# Altium PCB fmc-5pof.PcbDoc (part 1 of 2)
Units mm, origin at the board's own origin, x right, y up, seen from the top; angles counter-clockwise.
Board outline 76.75 x 69 mm, 2 copper layers (Top Layer, Bottom Layer); 109 components, 129 nets, 446 pads, 85 vias.
Unrouted connection lines stored in the file: 1.
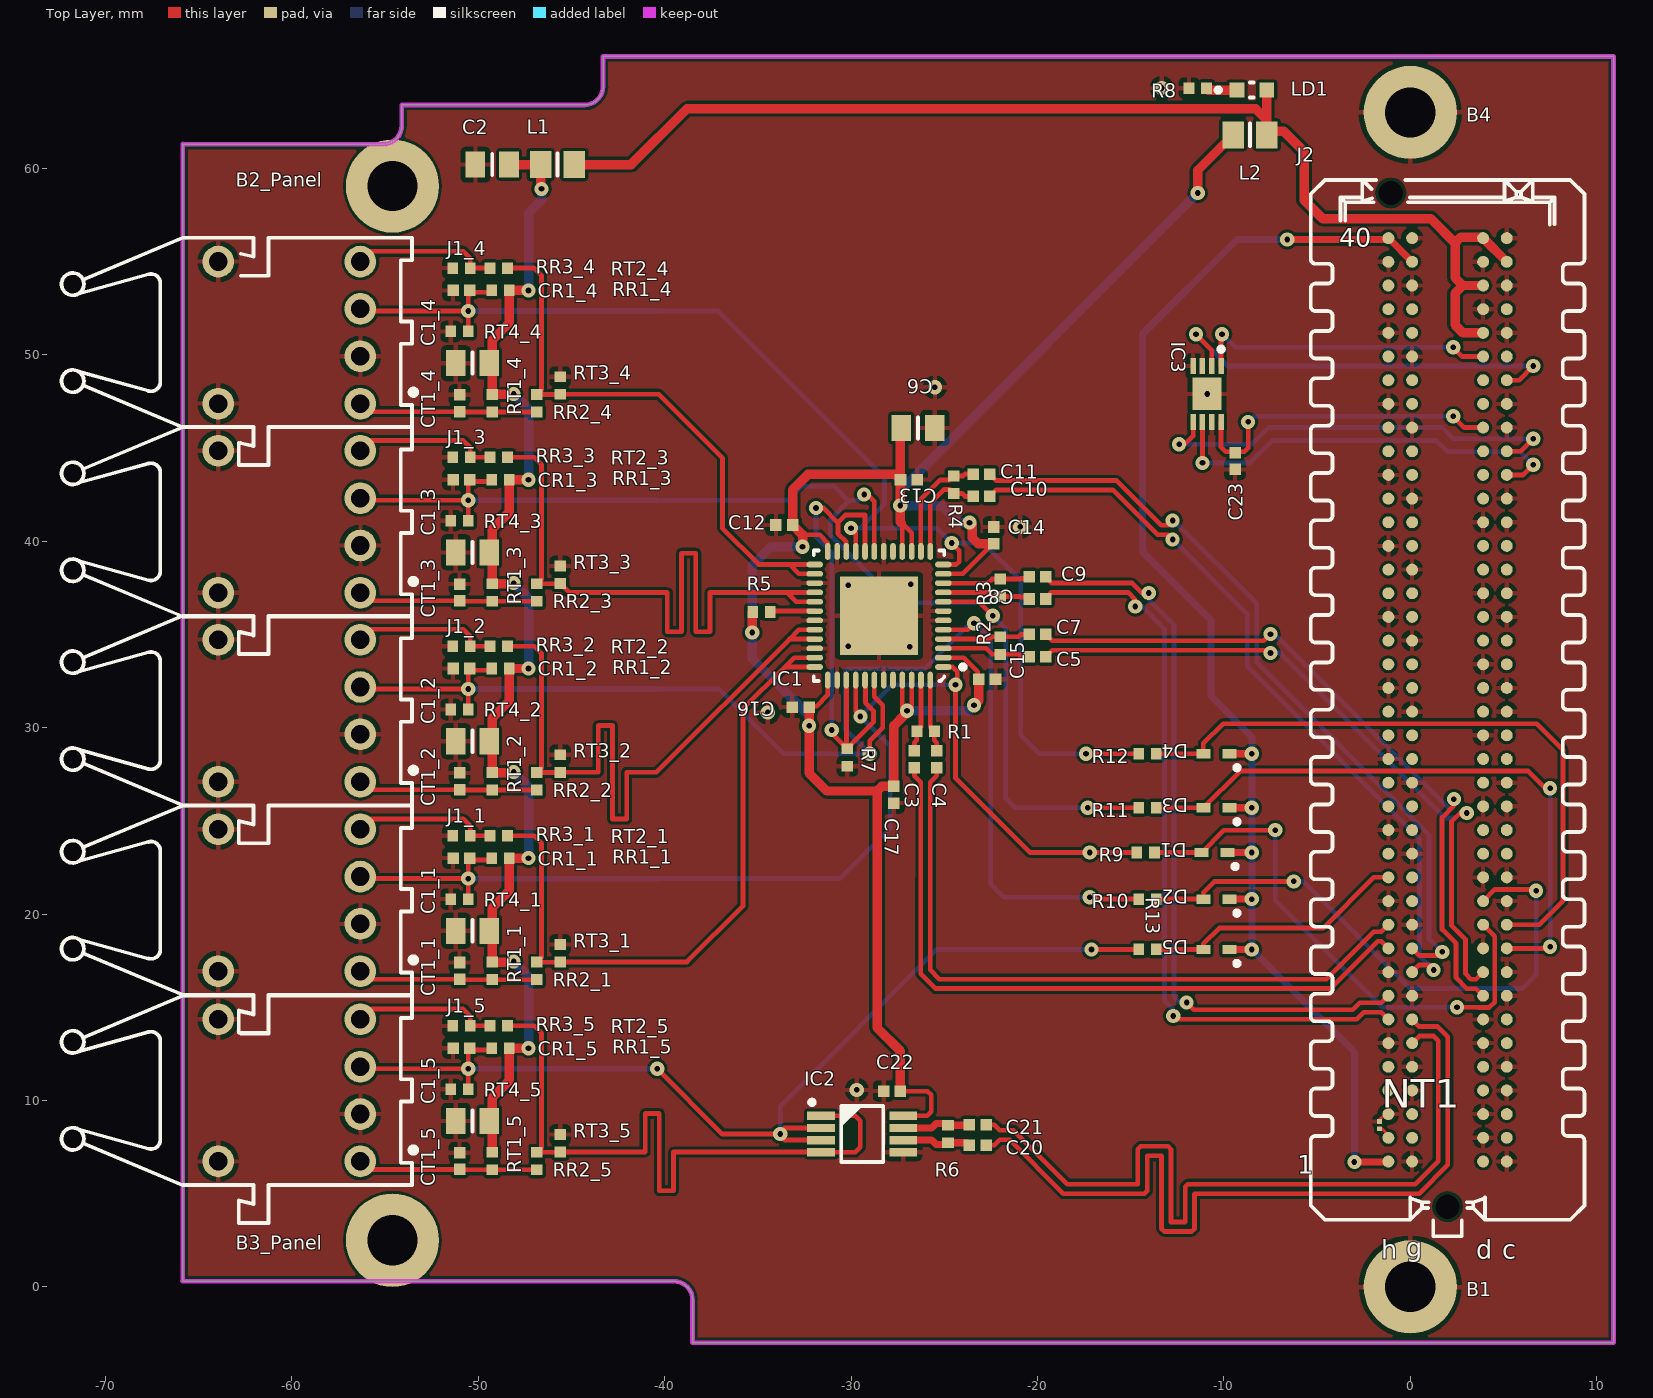
[diagram p0: Top Layer view]
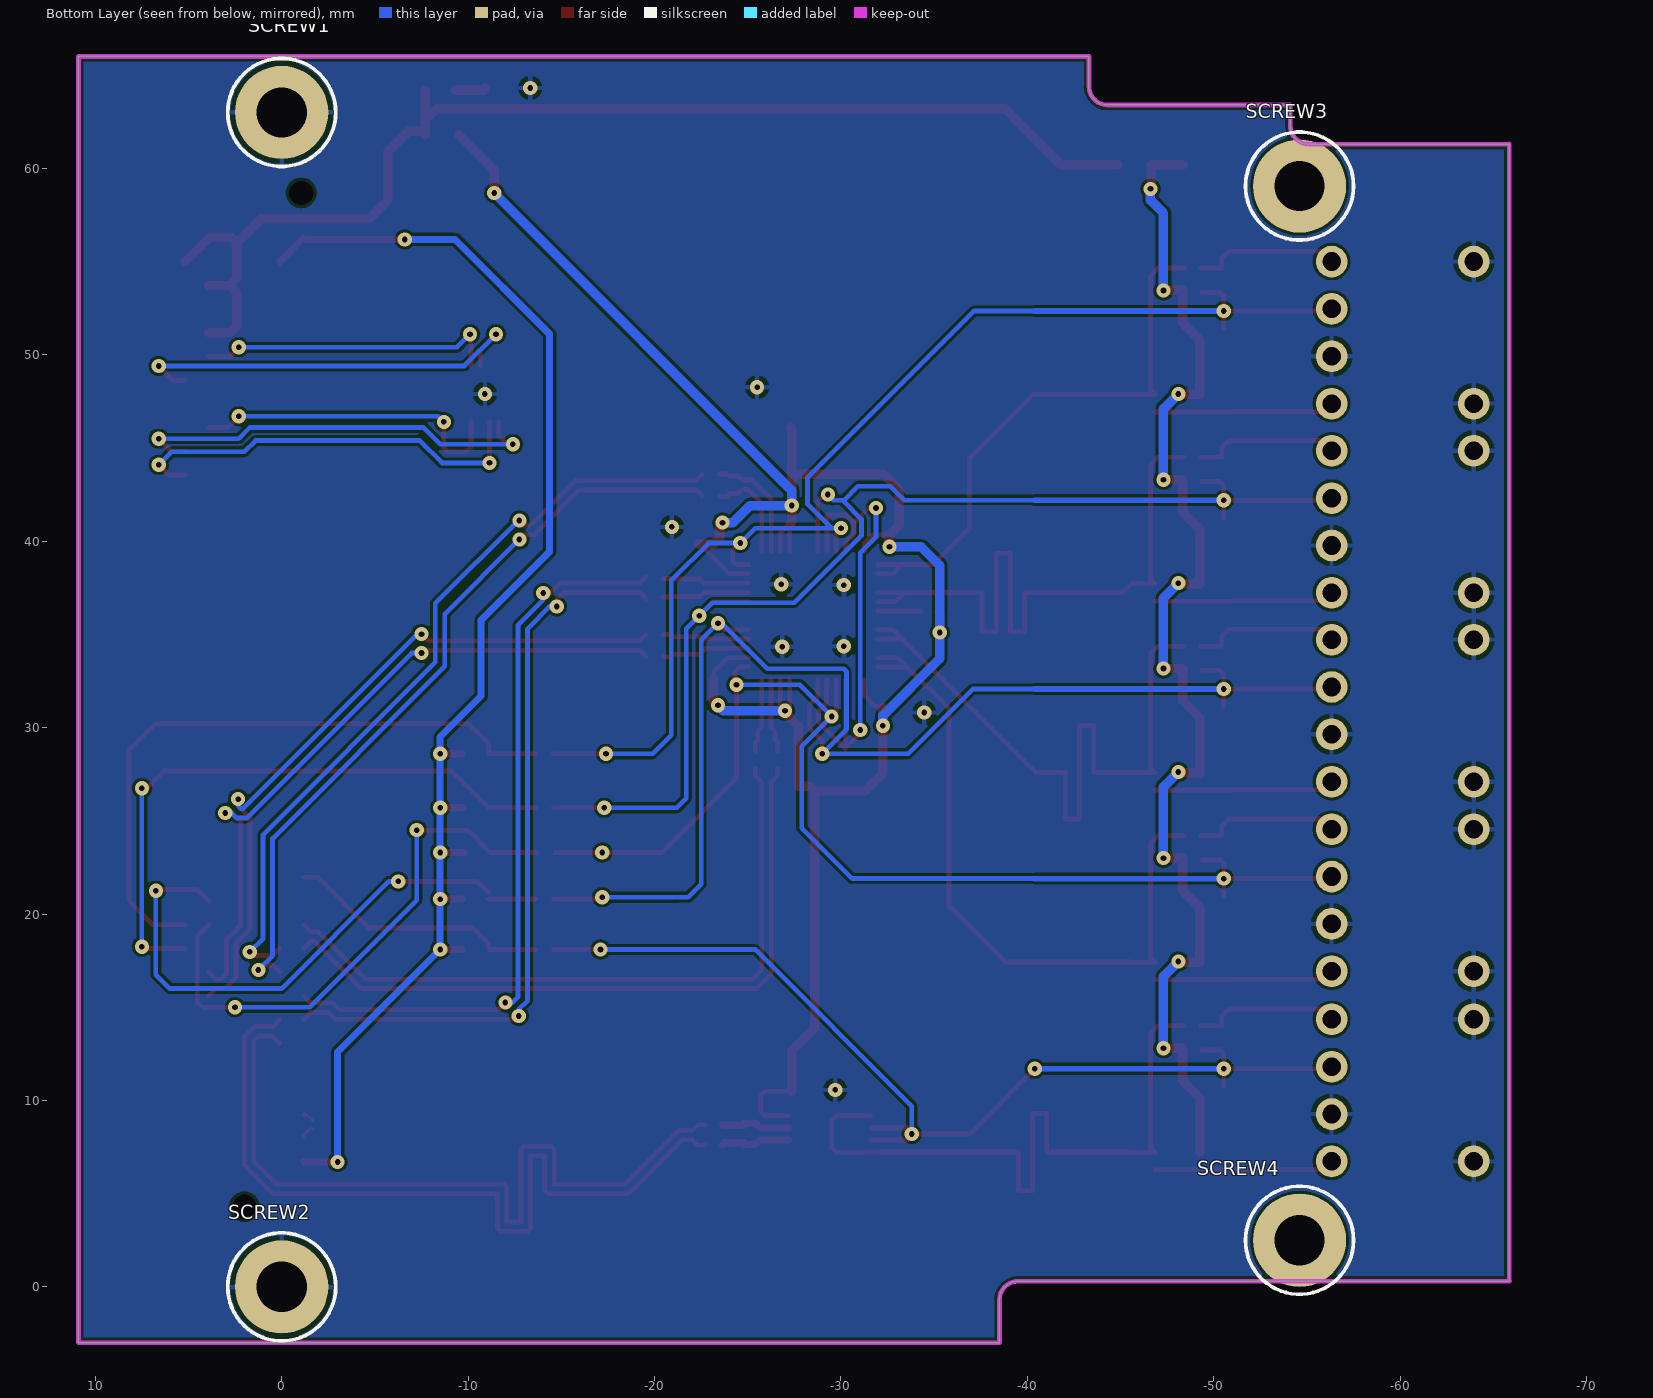
[diagram p1: Bottom Layer view, seen from below]
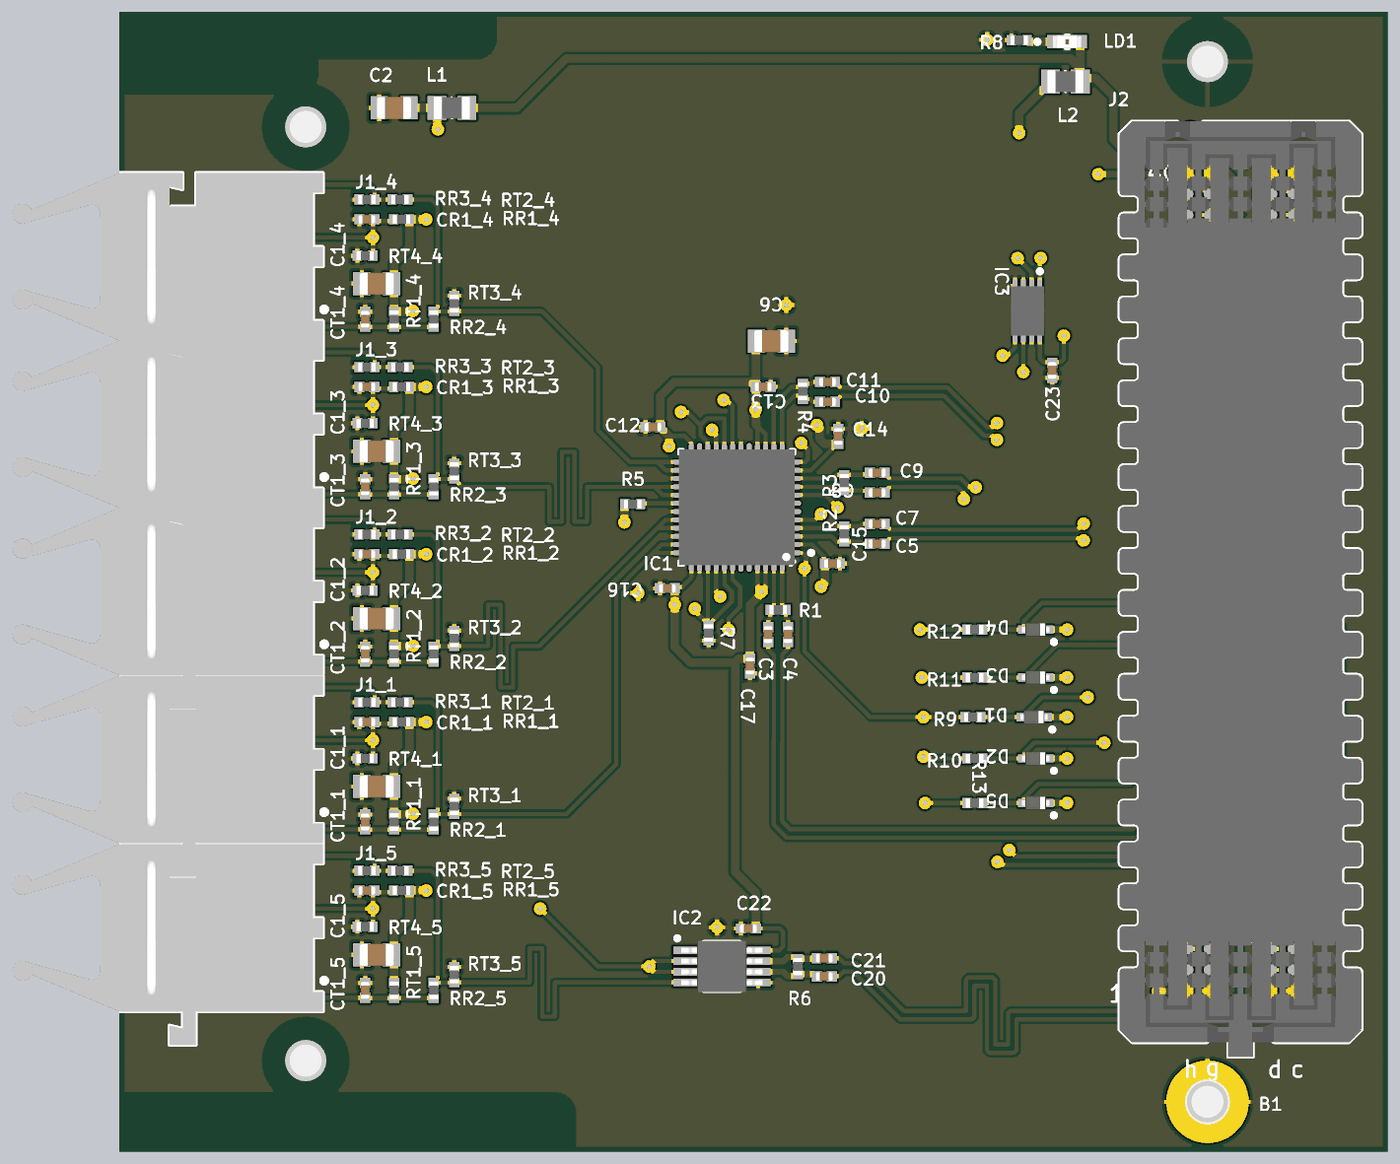
[diagram p2: 3D render of the assembled board from above, using the file's embedded part models]

## Layer stack, top to bottom
Top Solder: solder mask 0.0102, Solder Resist, Dk 3.5
Top Layer: signal copper 0.0356
Dielectric 1: dielectric 0.32, FR-4, Dk 4.8
Bottom Layer: signal copper 0.0356
Bottom Solder: solder mask 0.0102, Solder Resist, Dk 3.5

## Board outline
-65.85,0.3 -65.85,61.3 -65.852,61.296 -55.106,61.296 -55.1,61.3 ccw(c-55.1,62.3) -54.1,62.3 -54.1,63.4 -44.3,63.4 ccw(c-44.3,64.4) -43.3,64.4 -43.3,66 10.9,66 10.9,-3 -38.5,-3 -38.5,-0.7 ccw(c-39.5,-0.7) -39.5,0.3

## Design rules (kind name [scope] priority, off if disabled: settings)
BoardOutlineClearance [All] p1: gap=0.254 ignorepadtopadclearanceinfootprint=FALSE except(0: Arc-SplitContinuation Track-SplitContinuation SMDPad-SplitContinuation THPad-SplitContinuation Via-SplitContinuation Fill-SplitContinuation Poly-SplitContinuation Region-SplitContinuation Text-SplitContinuation)
Clearance [All] p1: gap=0.152 ignorepadtopadclearanceinfootprint=TRUE
ComponentClearance SAMTECandHole [InComponent('J2') vs HasFootprint('MTG270_500_M')] p1: gap=0 collisioncheckmode=3 verticalgap=0.254 showdistances=FALSE
ComponentClearance OverlapPOF [(ObjectKind = 'Component') And (Footprint = 'AFBR-x624Z') vs (ObjectKind = 'Component') And (Footprint = 'AFBR-x624Z')] p2: gap=-2 collisioncheckmode=3 verticalgap=0.254 showdistances=FALSE
ComponentClearance ScrewAndHole [HasFootprint('BOSSARD_BN5687-3061597_v') vs HasFootprint('MTG270_500_M')] p3: gap=-10 collisioncheckmode=3 verticalgap=-10 showdistances=FALSE
ComponentClearance ComponentClearance_1 [All] p4: gap=0.254 collisioncheckmode=3 verticalgap=0.254 showdistances=FALSE
DiffPairsRouting [All] p1: maxlimit=0.762 minlimit=0.178 mostfreqgap=0.254 toplayer_minwidth=0.254 toplayer_maxwidth=0.762 toplayer_prefwidth=0.254 bottomlayer_minwidth=0.254 bottomlayer_maxwidth=0.762 bottomlayer_prefwidth=0.254 maxuncoupledlength=12.7
MatchedLengths Buffer_POF [InNetClass('Buffer_POF[1..5]')] p1: tolerance=7.62 checknetsindiffpair=FALSE checkdiffpairvsdiffpair=TRUE checkxsignals=TRUE checkothers=TRUE
MatchedLengths FMC_Buffer [InNetClass('LVDS_IO')] p2: tolerance=7.62 checknetsindiffpair=FALSE checkdiffpairvsdiffpair=TRUE checkxsignals=TRUE checkothers=TRUE
MinimumAnnularRing [All] p1: minimumring=0.152
PermittedLayers [All] p1: toplayerpermitted=TRUE bottomlayerpermitted=FALSE
PolygonConnect [All] p1: connectstyle=Relief reliefconductorwidth=0.254 reliefentries=4 polygonreliefangle="90 Angle" airgapwidth=0.254
RoomDefinition POF5 [InComponentClass('POF5')] p1: confinementstyle=ConfineIn formatcopy=TRUE lockcomponents=FALSE outline -72.831,3.25 -40.831,3.25 -40.831,16.25 -72.831,16.25
RoomDefinition POF4 [InComponentClass('POF4')] p2: confinementstyle=ConfineIn formatcopy=TRUE lockcomponents=FALSE outline -72.831,43.9 -40.831,43.9 -40.831,56.9 -72.831,56.9
RoomDefinition POF3 [InComponentClass('POF3')] p3: confinementstyle=ConfineIn formatcopy=TRUE lockcomponents=FALSE outline -72.831,33.75 -40.831,33.75 -40.831,46.75 -72.831,46.75
RoomDefinition POF2 [InComponentClass('POF2')] p4: confinementstyle=ConfineIn formatcopy=TRUE lockcomponents=FALSE outline -72.831,23.62 -40.831,23.62 -40.831,36.62 -72.831,36.62
RoomDefinition POF1 [InComponentClass('POF1')] p5: confinementstyle=ConfineIn formatcopy=TRUE lockcomponents=FALSE outline -72.831,13.45 -40.831,13.45 -40.831,26.45 -72.831,26.45
RoutingVias [All] p1: holewidth=0.711 width=1.27 viastyle="Through Hole" minholewidth=0.305 minwidth=0.762 maxholewidth=0.711 maxwidth=1.27
SolderMaskExpansion [All] p1: expansion=0.102
UnRoutedNet [All] p1: checkbadconnections=TRUE
Width [All] p1: maxlimit=5 minlimit=0.152 preferedwidth=0.152 minimp=50.000000 maximp=50.000000 favimp=50.000000
27 further rules are at their usual default settings.

## Classes and differential pairs
component class Data_IO_Sheet: C2 C3 C4 C5 C6 C7 C8 C9 C10 C11 C12 C13 C14 C15 C16 C17 C20 C21 C22 IC1 IC2 L1 L2 R1 R2 R3 R4 R5 R6 R7
component class FMC_Connector_Sheet: B1 B2_Panel B3_Panel B4 C23 D1 D2 D3 D4 D5 IC3 J2 LD1 NT1 R8 R9 R10 R11 R12 R13 SCREW1 SCREW2 SCREW3 SCREW4
component class POF1: C1_1 CR1_1 CT1_1 J1_1 RR1_1 RR2_1 RR3_1 RT1_1 RT2_1 RT3_1 RT4_1
component class POF2: C1_2 CR1_2 CT1_2 J1_2 RR1_2 RR2_2 RR3_2 RT1_2 RT2_2 RT3_2 RT4_2
component class POF3: C1_3 CR1_3 CT1_3 J1_3 RR1_3 RR2_3 RR3_3 RT1_3 RT2_3 RT3_3 RT4_3
component class POF4: C1_4 CR1_4 CT1_4 J1_4 RR1_4 RR2_4 RR3_4 RT1_4 RT2_4 RT3_4 RT4_4
component class POF5: C1_5 CR1_5 CT1_5 J1_5 RR1_5 RR2_5 RR3_5 RT1_5 RT2_5 RT3_5 RT4_5
net class Buffer_POF[1..5]: Buffer_POF1 Buffer_POF2 Buffer_POF3 Buffer_POF4 Buffer_POF5
net class LVDS_IO_C: LVDS_IO1C_N LVDS_IO1C_P LVDS_IO2C_N LVDS_IO2C_P LVDS_IO3C_N LVDS_IO3C_P LVDS_IO4C_N LVDS_IO4C_P LVDS_IO5C_N LVDS_IO5C_P
net class LVDS_IO: LA00_CC_N LA00_CC_P LA01_CC_N LA01_CC_P LA02_N LA02_P LA03_N LA03_P LA04_N LA04_P
net class POF_IsReceiver[1..5]: POF_IsReceiver1 POF_IsReceiver2 POF_IsReceiver3 POF_IsReceiver4 POF_IsReceiver5
channel class POF: POF1 POF2 POF3 POF4 POF5
differential pair LA01_CC: +LA01_CC_P -LA01_CC_N
differential pair LA00_CC: +LA00_CC_P -LA00_CC_N
differential pair LA02: +LA02_P -LA02_N
differential pair LA03: +LA03_P -LA03_N
differential pair LA04: +LA04_P -LA04_N
differential pair LVDS_IO1C: +LVDS_IO1C_P -LVDS_IO1C_N
differential pair LVDS_IO2C: +LVDS_IO2C_P -LVDS_IO2C_N
differential pair LVDS_IO3C: +LVDS_IO3C_P -LVDS_IO3C_N
differential pair LVDS_IO4C: +LVDS_IO4C_P -LVDS_IO4C_N
differential pair LVDS_IO5C: +LVDS_IO5C_P -LVDS_IO5C_N

## Components (designator, comment, footprint, x,y, rotation, side; value= is the part's Value field where it differs from the comment)
B1 "Plated Hole" MTG270_500_M#1 0,0.1 r0 top
B2_Panel "Plated Hole" MTG270_500_M#2 95.169,55 r90 top
B3_Panel "Plated Hole" MTG270_500_M#3 72.169,57.25 r90 top
B4 "Plated Hole" MTG270_500_M#4 129.4,54.5 r0 top
C1_1 "10uF" CAPC2012X135N -50.3,19.1 r0 top (schematic designator C1)
C1_2 "10uF" CAPC2012X135N -50.3,29.27 r0 top (schematic designator C1)
C1_3 "10uF" CAPC2012X135N -50.3,39.4 r0 top (schematic designator C1)
C1_4 "10uF" CAPC2012X135N -50.3,49.55 r0 top (schematic designator C1)
C1_5 "10uF" CAPC2012X135N -50.3,8.9 r0 top (schematic designator C1)
C2 "10uF" CAPC2012X135N -49.25,60.2 r0 top
C3 "100nF" CAPC1005X55N -26.6,28.3 r90 top
C4 "100nF" CAPC1005X55N -25.4,28.3 r90 top
C5 "100nF" CAPC1005X55N -20,33.8 r180 top
C6 "10uF" CAPC2012X135N -26.405,46.076 r180 top
C7 "100nF" CAPC1005X55N -20,35 r180 top
C8 "100nF" CAPC1005X55N -20,36.9 r180 top
C9 "100nF" CAPC1005X55N -20,38.1 r180 top
C10 "100nF" CAPC1005X55N -23,42.4 r180 top
C11 "100nF" CAPC1005X55N -23,43.6 r180 top
C12 "100nF" CAPC1005X55N -33.579,40.869 r0 top
C13 "100nF" CAPC1005X55N -26.899,43.307 r180 top
C14 "100nF" CAPC1005X55N -22.352,40.31 r270 top
C15 "100nF" CAPC1005X55N -22.7,32.6 r180 top
C16 "100nF" CAPC1005X55N -32.7,31.1 r0 top
C17 "100nF" CAPC1005X55N -27.7,26.4 r90 top
C20 "100nF" CAPC1005X55N -23.2,7.6 r180 top
C21 "100nF" CAPC1005X55N -23.2,8.7 r180 top
C22 "100nF" CAPC1005X55N -27.8,10.5 r0 top
C23 "100nF" CAPC1005X55N -9.4,44.3 r90 top
CR1_1 "100nF" CAPC1005X55N -50.9,23 r0 top (schematic designator CR1)
CR1_2 "100nF" CAPC1005X55N -50.9,33.17 r0 top (schematic designator CR1)
CR1_3 "100nF" CAPC1005X55N -50.9,43.3 r0 top (schematic designator CR1)
CR1_4 "100nF" CAPC1005X55N -50.9,53.45 r0 top (schematic designator CR1)
CR1_5 "100nF" CAPC1005X55N -50.9,12.8 r0 top (schematic designator CR1)
CT1_1 "100nF" CAPC1005X55N -51,16.95 r270 top (schematic designator CT1)
CT1_2 "100nF" CAPC1005X55N -51,27.12 r270 top (schematic designator CT1)
CT1_3 "100nF" CAPC1005X55N -51,37.25 r270 top (schematic designator CT1)
CT1_4 "100nF" CAPC1005X55N -51,47.4 r270 top (schematic designator CT1)
CT1_5 "100nF" CAPC1005X55N -51,6.75 r270 top (schematic designator CT1)
D1 "PMEG4002EB" SODFL1608X65N -10.5,23.3 r180 top
D2 "PMEG4002EB" SODFL1608X65N -10.4,20.8 r180 top
D3 "PMEG4002EB" SODFL1608X65N -10.4,25.7 r180 top
D4 "PMEG4002EB" SODFL1608X65N -10.4,28.6 r180 top
D5 "PMEG4002EB" SODFL1608X65N -10.4,18.1 r180 top
IC1 "SN65MLVD040RGZT" QFN50P700X700X100-49N-S420 -28.5,36 r180 top
IC2 "SN65LVDM176DGK" SOP65P490X110-8N -29.4,8.2 r0 top
IC3 "24AA64T-I/MC" SON50P300X200X100-9N-R175X155 -10.9,47.9 r270 top
J1_1 "AFBR-2624Z" AFBR-x624Z -60.131,20.74 r180 top (schematic designator J1)
J1_2 "AFBR-2624Z" AFBR-x624Z -60.131,30.91 r180 top (schematic designator J1)
J1_3 "AFBR-2624Z" AFBR-x624Z -60.131,41.04 r180 top (schematic designator J1)
J1_4 "AFBR-2624Z" AFBR-x624Z -60.131,51.19 r180 top (schematic designator J1)
J1_5 "AFBR-2624Z" AFBR-x624Z -60.131,10.54 r180 top (schematic designator J1)
J2 "VITA 57" SAMTEC_ASP-134604-01 2,31.491 r270 top
L1 "220R@100MHz" INDC2012X105N -45.75,60.2 r180 top
L2 "220R@100MHz" INDC2012X105N -8.6,61.8 r180 top
LD1 "Green" LED_OSRAM_LGL29K -8.5,64.2 r0 top
NT1 "Net Tie" "Net Tie" -1.702,8.788 r270 top net-tie
R1 "100" RESC1005X40N -26,29.8 r180 top
R2 "100" RESC1005X40N -22,34.4 r270 top
R3 "100" RESC1005X40N -22,37.5 r270 top
R4 "100" RESC1005X40N -24.5,43.03 r270 top
R5 "4k7" RESC1005X40N -34.8,36.2 r180 top
R6 "100" RESC1005X40N -24.8,8.2 r270 top
R7 "4k7" RESC1005X40N -30.2,28.4 r90 top
R8 "100" RESC1005X40N -11.4,64.3 r180 top
R9 "100" RESC1005X40N -14.2,23.3 r180 top
R10 "100" RESC1005X40N -14.1,20.8 r180 top
R11 "100" RESC1005X40N -14.1,25.7 r180 top
R12 "100" RESC1005X40N -14.1,28.6 r180 top
R13 "100" RESC1005X40N -14.1,18.1 r180 top
RR1_1 "0" RESC1005X40N -48.8,23 r180 top (schematic designator RR1)
RR1_2 "0" RESC1005X40N -48.8,33.17 r180 top (schematic designator RR1)
RR1_3 "0" RESC1005X40N -48.8,43.3 r180 top (schematic designator RR1)
RR1_4 "0" RESC1005X40N -48.8,53.45 r180 top (schematic designator RR1)
RR1_5 "0" RESC1005X40N -48.8,12.8 r180 top (schematic designator RR1)
RR2_1 "0" RESC1005X40N -46.85,16.95 r270 top (schematic designator RR2)
RR2_2 "0" RESC1005X40N -46.85,27.12 r270 top (schematic designator RR2)
RR2_3 "0" RESC1005X40N -46.85,37.25 r270 top (schematic designator RR2)
RR2_4 "0" RESC1005X40N -46.85,47.4 r270 top (schematic designator RR2)
RR2_5 "0" RESC1005X40N -46.85,6.75 r270 top (schematic designator RR2)
RR3_1 "0" RESC1005X40N -50.9,24.2 r0 top (schematic designator RR3)
RR3_2 "0" RESC1005X40N -50.9,34.37 r0 top (schematic designator RR3)
RR3_3 "0" RESC1005X40N -50.9,44.5 r0 top (schematic designator RR3)
RR3_4 "0" RESC1005X40N -50.9,54.65 r0 top (schematic designator RR3)
RR3_5 "0" RESC1005X40N -50.9,14 r0 top (schematic designator RR3)
RT1_1 "0" RESC1005X40N -49.25,16.95 r270 top (schematic designator RT1)
RT1_2 "0" RESC1005X40N -49.25,27.12 r270 top (schematic designator RT1)
RT1_3 "0" RESC1005X40N -49.25,37.25 r270 top (schematic designator RT1)
RT1_4 "0" RESC1005X40N -49.25,47.4 r270 top (schematic designator RT1)
RT1_5 "0" RESC1005X40N -49.25,6.75 r270 top (schematic designator RT1)
RT2_1 "0" RESC1005X40N -48.9,24.2 r180 top (schematic designator RT2)
RT2_2 "0" RESC1005X40N -48.9,34.37 r180 top (schematic designator RT2)
RT2_3 "0" RESC1005X40N -48.9,44.5 r180 top (schematic designator RT2)
RT2_4 "0" RESC1005X40N -48.9,54.65 r180 top (schematic designator RT2)
RT2_5 "0" RESC1005X40N -48.9,14 r180 top (schematic designator RT2)
RT3_1 "4k7" RESC1005X40N -45.6,17.9 r270 top (schematic designator RT3)
RT3_2 "4k7" RESC1005X40N -45.6,28.07 r270 top (schematic designator RT3)
RT3_3 "4k7" RESC1005X40N -45.6,38.2 r270 top (schematic designator RT3)
RT3_4 "4k7" RESC1005X40N -45.6,48.35 r270 top (schematic designator RT3)
RT3_5 "4k7" RESC1005X40N -45.6,7.7 r270 top (schematic designator RT3)
RT4_1 "0" RESC1005X40N -51,20.8 r0 top (schematic designator RT4)
RT4_2 "0" RESC1005X40N -51,30.97 r0 top (schematic designator RT4)
RT4_3 "0" RESC1005X40N -51,41.1 r0 top (schematic designator RT4)
RT4_4 "0" RESC1005X40N -51,51.25 r0 top (schematic designator RT4)
RT4_5 "0" RESC1005X40N -51,10.6 r0 top (schematic designator RT4)
SCREW1 "M2.5x6" BOSSARD_BN5687-3061597_v 0,63 r90 bottom
SCREW2 "M2.5x6" BOSSARD_BN5687-3061597_v 0,0 r90 bottom
SCREW3 "M2.5x6" BOSSARD_BN5687-3061597_v -54.6,59.05 r0 bottom
SCREW4 "M2.5x6" BOSSARD_BN5687-3061597_v -54.6,2.5 r90 bottom

## Footprints (in the part's own frame and the unit in brackets; to place one, negate y for a bottom-side part, rotate by r counter-clockwise, add the part's x,y. Pads: shape width x height; smd on the part's side, far side on the other; paste and mask are expansions set on the pad)
AFBR-x624Z [mm] "AFBR-x624Z, Fiber Optic Receiver, Through Hole Mount"
  round 1.7 hole 1: 1(-3.81,3.81) 2(-3.81,1.27) 3(-3.81,-1.27) 4(-3.81,-3.81) 5(3.81,3.81) 8(3.81,-3.81)
  silkscreen extent -6.8,-5.08 12.22,7.11, body extent -6.58,-5.08 12.22,7.11, height 7.66
BOSSARD_BN5687-3061597_v [mm] "M2.5 L=6mm Hexalobular Socket Pan Head Screw, Fully Threaded - Stainless Steel A2"
  silkscreen extent -2.9,-2.9 2.9,2.9, body extent -2.5,-2.5 2.5,2.5, height 2.1
CAPC1005X55N [mm] "Chip Capacitor, Body 1.0x0.55mm, IPC Medium Density"
  rect 0.62x0.62 smd: 1(-0.45,0) 2(0.45,0)
  body extent -0.52,-0.27 0.53,0.28, height 0.55
CAPC2012X135N [mm] "Chip Capacitor, Body 2.0x1.25mm, IPC Medium Density"
  rect 1.05x1.4 smd: 1(-0.9,0) 2(0.9,0)
  silkscreen extent 0,-0.58 0,0.58, body extent -1.05,-0.67 1.05,0.68, height 1.25
INDC2012X105N [mm] "Chip Inductor, EIA 0805, Metric 2012, Body 2.0x1.25mm, IPC Medium Density"
  rect 1.15x1.45 smd: 1(-0.9,0) 2(0.9,0)
  silkscreen extent 0,-0.6 0,0.6, body extent -1.1,-0.7 1.1,0.7, height 1.1
LED_OSRAM_LGL29K [mm] "Green Chip LED, 2-Leads, Body 1.7x0.8mm, IPC Medium Density"
  rect 0.8x0.8 smd: 1(-0.8,0) 2(0.8,0)
  silkscreen extent -1.92,-0.4 0.1,0.4, body extent -0.85,-0.4 0.85,0.4, height 0.67
MTG270_500_M#1 [mm] "Plated Through Hole: Hole Dia.=2.7mm Pad Dia.=5.0mm"
  round 5 / inner round 3 / far side round 5 hole 2.7: 1(0,-0.1)
MTG270_500_M#2 [mm] "Plated Through Hole: Hole Dia.=2.7mm Pad Dia.=5.0mm"
  round 5 / inner round 3 / far side round 5 hole 2.7: 1(4.05,149.769)
MTG270_500_M#3 [mm] "Plated Through Hole: Hole Dia.=2.7mm Pad Dia.=5.0mm"
  round 5 / inner round 3 / far side round 5 hole 2.7: 1(-54.75,126.769)
MTG270_500_M#4 [mm] "Plated Through Hole: Hole Dia.=2.7mm Pad Dia.=5.0mm"
  round 5 / inner round 3 / far side round 5 hole 2.7: 1(-129.4,8.5)
"Net Tie" [mil] "SMD Net Tie"
  rect 10x10 smd paste-2.5 mask-2.5: 1(-3,2) 2(12,2)
QFN50P700X700X100-49N-S420 [mm] "QFN, 0.50mm Pitch, Square; 48 Pin, 7.00mm L X 7.00mm W X 1mm H body (W/Thermal Tab 4.2mm X 4.2mm), IPC Medium Density"
  oval 0.9x0.3 smd: 1(-3.45,2.75) 2(-3.45,2.25) 3(-3.45,1.75) 4(-3.45,1.25) 5(-3.45,0.75) 6(-3.45,0.25) 7(-3.45,-0.25) 8(-3.45,-0.75) 9(-3.45,-1.25) 10(-3.45,-1.75) 11(-3.45,-2.25) 12(-3.45,-2.75) 25(3.45,-2.75) 26(3.45,-2.25) 27(3.45,-1.75) 28(3.45,-1.25) 29(3.45,-0.75) 30(3.45,-0.25) 31(3.45,0.25) 32(3.45,0.75) 33(3.45,1.25) 34(3.45,1.75) 35(3.45,2.25) 36(3.45,2.75)
  oval 0.3x0.9 smd: 13(-2.75,-3.45) 14(-2.25,-3.45) 15(-1.75,-3.45) 16(-1.25,-3.45) 17(-0.75,-3.45) 18(-0.25,-3.45) 19(0.25,-3.45) 20(0.75,-3.45) 21(1.25,-3.45) 22(1.75,-3.45) 23(2.25,-3.45) 24(2.75,-3.45) 37(2.75,3.45) 38(2.25,3.45) 39(1.75,3.45) 40(1.25,3.45) 41(0.75,3.45) 42(0.25,3.45) 43(-0.25,3.45) 44(-0.75,3.45) 45(-1.25,3.45) 46(-1.75,3.45) 47(-2.25,3.45) 48(-2.75,3.45)
  rect 4.2x4.2 smd: 49(0,0)
  silkscreen extent -4.63,-3.5 3.5,3.5, body extent -3.5,-3.5 3.5,3.5, height 1
RESC1005X40N [mm] "Chip Resistor, EIA 0402, Metric 1005, Body 1.0x0.5mm, IPC Medium Density"
  rect 0.58x0.62 smd: 1(-0.47,0) 2(0.47,0)
  body extent -0.52,-0.27 0.53,0.28, height 0.4
SAMTEC_ASP-134604-01 [mm] "Connector VITA 57, 160 Male contacts in 4 row cdgh"
  round 1 hole 1.3 unplated mask+0.3: 1(-27.191,-3.048) 2(27.191,0)
  round 0.64 smd: c1(24.765,3.175) c2(23.495,3.175) c3(22.225,3.175) c4(20.955,3.175) c5(19.685,3.175) c6(18.415,3.175) c7(17.145,3.175) c8(15.875,3.175) c9(14.605,3.175) c10(13.335,3.175) c11(12.065,3.175) c12(10.795,3.175) c13(9.525,3.175) c14(8.255,3.175) c15(6.985,3.175) c16(5.715,3.175) c17(4.445,3.175) c18(3.175,3.175) c19(1.905,3.175) c20(0.635,3.175) c21(-0.635,3.175) c22(-1.905,3.175) c23(-3.175,3.175) c24(-4.445,3.175) c25(-5.715,3.175) c26(-6.985,3.175) c27(-8.255,3.175) c28(-9.525,3.175) c29(-10.795,3.175) c30(-12.065,3.175) c31(-13.335,3.175) c32(-14.605,3.175) c33(-15.875,3.175) c34(-17.145,3.175) c35(-18.415,3.175) c36(-19.685,3.175) c37(-20.955,3.175) c38(-22.225,3.175) c39(-23.495,3.175) c40(-24.765,3.175) d1(24.765,1.905) d2(23.495,1.905) d3(22.225,1.905) d4(20.955,1.905) d5(19.685,1.905) d6(18.415,1.905) d7(17.145,1.905) d8(15.875,1.905) d9(14.605,1.905) d10(13.335,1.905) d11(12.065,1.905) d12(10.795,1.905) d13(9.525,1.905) d14(8.255,1.905) d15(6.985,1.905) d16(5.715,1.905) d17(4.445,1.905) d18(3.175,1.905) d19(1.905,1.905) d20(0.635,1.905) d21(-0.635,1.905) d22(-1.905,1.905) d23(-3.175,1.905) d24(-4.445,1.905) d25(-5.715,1.905) d26(-6.985,1.905) d27(-8.255,1.905) d28(-9.525,1.905) d29(-10.795,1.905) d30(-12.065,1.905) d31(-13.335,1.905) d32(-14.605,1.905) d33(-15.875,1.905) d34(-17.145,1.905) d35(-18.415,1.905) d36(-19.685,1.905) d37(-20.955,1.905) d38(-22.225,1.905) d39(-23.495,1.905) d40(-24.765,1.905) g1(24.765,-1.905) g2(23.495,-1.905) g3(22.225,-1.905) g4(20.955,-1.905) g5(19.685,-1.905) g6(18.415,-1.905) g7(17.145,-1.905) g8(15.875,-1.905) g9(14.605,-1.905) g10(13.335,-1.905) g11(12.065,-1.905) g12(10.795,-1.905) g13(9.525,-1.905) g14(8.255,-1.905) g15(6.985,-1.905) g16(5.715,-1.905) g17(4.445,-1.905) g18(3.175,-1.905) g19(1.905,-1.905) g20(0.635,-1.905) g21(-0.635,-1.905) g22(-1.905,-1.905) g23(-3.175,-1.905) g24(-4.445,-1.905) g25(-5.715,-1.905) g26(-6.985,-1.905) g27(-8.255,-1.905) g28(-9.525,-1.905) g29(-10.795,-1.905) g30(-12.065,-1.905) g31(-13.335,-1.905) g32(-14.605,-1.905) g33(-15.875,-1.905) g34(-17.145,-1.905) g35(-18.415,-1.905) g36(-19.685,-1.905) g37(-20.955,-1.905) g38(-22.225,-1.905) g39(-23.495,-1.905) g40(-24.765,-1.905) h1(24.765,-3.175) h2(23.495,-3.175) h3(22.225,-3.175) h4(20.955,-3.175) h5(19.685,-3.175) h6(18.415,-3.175) h7(17.145,-3.175) h8(15.875,-3.175) h9(14.605,-3.175) h10(13.335,-3.175) h11(12.065,-3.175) h12(10.795,-3.175) h13(9.525,-3.175) h14(8.255,-3.175) h15(6.985,-3.175) h16(5.715,-3.175) h17(4.445,-3.175) h18(3.175,-3.175) h19(1.905,-3.175) h20(0.635,-3.175) h21(-0.635,-3.175) h22(-1.905,-3.175) h23(-3.175,-3.175) h24(-4.445,-3.175) h25(-5.715,-3.175) h26(-6.985,-3.175) h27(-8.255,-3.175) h28(-9.525,-3.175) h29(-10.795,-3.175) h30(-12.065,-3.175) h31(-13.335,-3.175) h32(-14.605,-3.175) h33(-15.875,-3.175) h34(-17.145,-3.175) h35(-18.415,-3.175) h36(-19.685,-3.175) h37(-20.955,-3.175) h38(-22.225,-3.175) h39(-23.495,-3.175) h40(-24.765,-3.175)
  silkscreen extent -27.89,-7.34 28.78,7.34, body extent -27.89,-7.34 28.78,7.34, height 5.61
SODFL1608X65N [mm] "Ultra Small Outline Diode Flat Lead (SOD-523), Body; 1.2mm L X 0.8mm W X 0.65mm H, IPC Medium Density"
  rect 0.75x0.5 smd: 1(-0.7,0) 2(0.7,0)
  silkscreen extent -1.23,0.63 -0.98,0.87, body extent -0.82,-0.42 0.83,0.43, height 0.65
SON50P300X200X100-9N-R175X155 [mm] "SON (DFN), 0.50mm pitch, 8 pin, 2mm X 3mm X 1.00mm H body (w/thermal tab 1.75 X 1.55mm),  IPC Medium Density"
  rect 0.85x0.3 smd: 1(-1.5,0.75) 2(-1.5,0.25) 3(-1.5,-0.25) 4(-1.5,-0.75) 5(1.5,-0.75) 6(1.5,-0.25) 7(1.5,0.25) 8(1.5,0.75)
  rect 1.75x1.55 smd: 9(0,0)
  silkscreen extent -2.52,0.63 -2.28,0.88, body extent -1.5,-1 1.5,1, height 1.02
SOP65P490X110-8N [mm] "SOP, 0.65mm pitch; 8 pin, 3.00mm W X 3.00mm L X 1.10mm H body, IPC Medium Density"
  rect 1.5x0.45 smd: 1(-2.2,0.975) 2(-2.2,0.325) 3(-2.2,-0.325) 4(-2.2,-0.975) 5(2.2,-0.975) 6(2.2,-0.325) 7(2.2,0.325) 8(2.2,0.975)
  silkscreen extent -2.82,-1.5 1.12,1.82, body extent -2.45,-1.55 2.45,1.55, height 1.1

## Part data
B1 B2_Panel B3_Panel B4: library part PLATED_HOLE2.7_PAD5.0_M, "Single Terminal Socket", Author="LNLS DIG FCS", ComponentHeight=0mm, Component Type="Standard (No BOM)", CreateDate=06/06/2016, Family="Plated Hole", HelpURL=Undefined, LatestRevisionDate=06/06/2016, Mounted=No, PackageDescription="Plated Through Hole: Hole Dia.=2.7mm Pad Dia.=5.0mm Middle hole 3mm", Part Description="Plated Through Hole: Hole Dia.=2.7mm Pad Dia.=5.0mm Middle hole 3mm", Part Number=PLATED_HOLE2.7_PAD5.0_M, Pin Count=1, Sense=No, SMD=No, Socket=No, Status=None
C1_1 C1_2 C1_3 C1_4 C1_5 C2 C6: library part CC0805_10UF_10V_10%_X7R, "Non-polarised capacitor", Case=0805, Manufacturer=GENERIC, Manufacturer1 ComponentHeight=1.35mm, Manufacturer1 Example=MURATA, Manufacturer1 Part Number=GRM21BR71A106KE51L, Tolerance=±10%, Voltage=10V, Author="CERN DEM JLC", Component Type=Standard, CreateDate=30/04/2012, HelpURL=\\cern.ch\dfs\Applications\Altium\Datasheets\CC0805_X7R_MURATA.pdf, LatestRevisionDate=30/04/2012, Manufacturer Part Number=CC0805_10UF_10V_10%_X7R, Mounted=Yes, Part Description="SMD Multilayer Chip Ceramic Capacitor", Part Number=CC0805_10UF_10V_10%_X7R, Pin Count=2, Sense=No, SMD=Yes, Socket=No, Status=Preferred, TC=X7R
C3 C4 C5 C7 C8 C9 C10 C11 C12 C13 C14 C15 C16 C17 C20 C21 C22 C23 CR1_1 CR1_2 CR1_3 CR1_4 CR1_5 CT1_1 CT1_2 CT1_3 CT1_4 CT1_5: library part CC0402_100NF_16V_10%_X5R, "Non-polarised capacitor", Case=0402, Manufacturer=GENERIC, Manufacturer1 ComponentHeight=0.55mm, Manufacturer1 Example=MURATA, Manufacturer1 Part Number=GRM155R61C104KA88D, Tolerance=±10%, Voltage=16V, Author="CERN DEM JLC", Component Type=Standard, CreateDate=10/12/2013, HelpURL=\\cern.ch\dfs\Applications\Altium\Datasheets\CC0402_X5R_MURATA_GRM.pdf, LatestRevisionDate=10/12/2013, Manufacturer Part Number=CC0402_100NF_16V_10%_X5R, Mounted=Yes, Part Description="SMD Multilayer Chip Ceramic Capacitor", Part Number=CC0402_100NF_16V_10%_X5R, Pin Count=2, Sense=No, SMD=Yes, Socket=No, Status=None, TC=X5R
D1 D2 D3 D4 D5: "Schottky Diode", Case=SOD523, Manufacturer="NXP SEMICONDUCTORS", Power=200mA, Voltage=40V, Author="CERN DEM JMW", Bonding=No, ComponentHeight=0.65mm, Component Type=Standard, CreateDate=21/04/2009, Device=PMEG4002EB, HelpURL=\\cern.ch\dfs\Applications\Altium\Datasheets\PMEG4002EB.pdf, LatestRevisionDate=07/05/2009, Manufacturer Part Number=PMEG4002EB, Mounted=Yes, PackageDescription="Ultra Small Outline Diode Flat Lead (SOD-523), Body; 1.2mm L X 0.8mm W X 0.65mm H, IPC Medium Density", Part Description="Very Low VF MEGA Schottky Barrier Rectifier", Part Number=PMEG4002EB, Pin Count=2, PressFit=No, Sense=No, SMD=Yes, Socket=No
IC1: "4-Channel Half-Duplex M-LVDS Line Transceiver", Case=QFN48, Manufacturer="TEXAS INSTRUMENTS", Author="CERN DEM JLC", Bonding=No, ComponentHeight=1mm, Component Type=Standard, CreateDate=17/03/2011, Device=SN65MLVD040RGZT, HelpURL=\\cern.ch\dfs\Applications\Altium\Datasheets\SN65MLVD040RGZT.pdf, LatestRevisionDate=17/03/2011, Manufacturer Part Number=SN65MLVD040RGZT, Mounted=Yes, PackageDescription="QFN, 0.50mm Pitch, Square; 48 Pin, 7.00mm L X 7.00mm W X 1mm H body (W/Thermal Tab 4.2mm X 4.2mm), IPC Medium Density", Part Description="4-Channel Half-Duplex M-LVDS Line Transceiver", Part Number=SN65MLVD040RGZT, Pin Count=49, PressFit=No, Sense=No, SMD=Yes, Socket=No
IC2: "Half-Duplex LVDM Transceiver", Case=SSOP8, Manufacturer="TEXAS INSTRUMENTS", Author="CERN DEM JLC", Bonding=No, ComponentHeight=1.1mm, Component Type=Standard, CreateDate=18/07/2014, Device=SN65LVDM176DGK, HelpURL=\\cern.ch\dfs\Applications\Altium\Datasheets\SN65LVDM176DGK.pdf, LatestRevisionDate=18/07/2014, Manufacturer Part Number=SN65LVDM176DGK, Mounted=Yes, PackageDescription="SOP, 0.65mm, Pitch; 8 Pin, 3.0mm W X 3.0mm L X 1.10mm H Body, IPC Medium Density", Part Description="High-Speed, Half-Duplex LVDM Transceiver", Part Number=SN65LVDM176DGK, Pin Count=8, PressFit=No, Sense=No, SMD=Yes, Socket=No
IC3: "1.7-5.5V 64K I2C Serial EEPROM", Case=DFN8, Manufacturer="MICROCHIP TECHNOLOGY", Author="CERN DEM JLC", Bonding=No, ComponentHeight=1mm, Component Type=Standard, CreateDate=18/11/2009, Device=24AA64T-I/MC, HelpURL=\\cern.ch\dfs\Applications\Altium\Datasheets\24AA64T-I-MC.pdf, LatestRevisionDate=24/01/2011, Manufacturer Part Number=24AA64T-I/MC, Mounted=Yes, PackageDescription="SON (DFN), 0.50mm pitch, 8 pin, 2mm X 3mm X 1.00mm H body (w/thermal tab 1.75 X 1.55mm),  IPC Medium Density", Part Description="1.7V-5.5V, 64K  (8K x 8-bit) I2C Serial EEPROM", Part Number=24AA64T-I/MC, Pin Count=9, PressFit=No, Sense=No, SMD=Yes, Socket=No
J1_1 J1_2 J1_3 J1_4 J1_5: "DC-50MBd Versatile Link Fiber Optic Receiver for 1 mm POF and 200 µm PCS", Manufacturer="AVAGO TECHNOLOGIES", Author="CERN DEM MR", ComponentHeight=7.62mm, Component Type=Standard, CreateDate=18/05/2016, Device=AFBR-2624Z, Family="Optical Fiber", HelpURL=\\cern.ch\dfs\Applications\Altium\Datasheets\AFBR-2624Z.pdf, LatestRevisionDate=18/05/2016, Manufacturer Part Number=AFBR-2624Z, Mounted=Yes, Part Description="DC-50MBd Versatile Link Fiber Optic Receiver for 1 mm POF and 200 µm PCS", Part Number=AFBR-2624Z, Pin Count=6, PressFit=No, Sense=No, SMD=No, Socket=No, Status=None
J2: library part SAMTEC_ASP-134604-01, "Connector VITA 57, 160 Male contacts in 4 row cdgh", Manufacturer=SAMTEC, Manufacturer Part Number=ASP-134604-01, Author="CERN DEM JLC", ComponentHeight=6.1mm, Component Type=Standard, CreateDate=31/08/2011, Family="VITA 57", HelpURL=\\cern.ch\dfs\Applications\Altium\Datasheets\SAMTEC_ASP-134604-01.pdf, LatestRevisionDate=31/08/2011, Mounted=Yes, Part Description="160 contacts (4 rows cdgh) Surface Mount Male Connector, VITA 57 (MC-LPC-10)", Part Number=SAMTEC_ASP-134604-01, Pin Count=160, PressFit=No, Sense=No, SMD=Yes, Socket=No, Status=None
L1 L2: library part IND0805_MURATA_BLM21PG221SN1D, "Inductor", Case=0805, Manufacturer=MURATA, Manufacturer Part Number=BLM21PG221SN1D, Power=2A, Resistance=0.05R, Tolerance=±25%, Author="CERN DEM JLC", ComponentHeight=1.05mm, Component Type=Standard, CreateDate=25/01/2010, HelpURL=\\cern.ch\dfs\Applications\Altium\Datasheets\IND0402_MURATA_BLM21P.pdf, LatestRevisionDate=25/01/2010, Mounted=Yes, Part Description="SMD EMIFIL Suppression Chip Ferrite Bead", Part Number=IND0805_MURATA_BLM21PG221SN1D, Pin Count=2, Sense=No, SMD=Yes, Socket=No, Status=None
LD1: library part "LED_OSRAM_LG L29K-G2J1-24-Z", "LED Green 1C 2A", Case=0603, Manufacturer=OSRAM, Manufacturer Part Number="LG L29K-G2J1-24-Z", Author="CERN DEM JLC", Bonding=No, Color=Green, ComponentHeight=0.67mm, Component Type=Standard, CreateDate=24/04/2012, HelpURL=\\cern.ch\dfs\Applications\Altium\Datasheets\LED_OSRAM_LGL29K.pdf, LatestRevisionDate=24/04/2012, Mounted=Yes, PackageDescription="Green Chip LED, 2-Leads, Body 1.7x0.8mm, IPC Medium Density", Part Description="Surface Mount Green LED (0603 Case)", Part Number="LED_OSRAM_LG L29K-G2J1-24-Z", Pin Count=2, PressFit=No, Sense=No, SMD=Yes, Socket=No
R1 R2 R3 R4 R6 R8 R9 R10 R11 R12 R13: library part R0402_100R_1%_0.0625W_100PPM, "Resistor - 1%", Case=0402, Manufacturer=GENERIC, Manufacturer1 ComponentHeight=0.4mm, Manufacturer1 Example="YAGEO PHYCOMP", Manufacturer1 Part Number=232270671001L, Power=0.0625W, Tolerance=±1%, Author="CERN DEM JLC", Component Type=Standard, CreateDate=03/12/2007, HelpURL=\\cern.ch\dfs\Applications\Altium\Datasheets\R0402_Phycomp_RC0402.pdf, LatestRevisionDate=17/10/2012, Manufacturer Part Number=R0402_100R_1%_0.0625W_100PPM, Mounted=Yes, Part Description="General Purpose Thick Film Chip Resistor", Part Number=R0402_100R_1%_0.0625W_100PPM, Pin Count=2, Sense=No, SMD=Yes, Socket=No, Status="Not recommended", TC=±100ppm/°C
R5 R7 RT3_1 RT3_2 RT3_3 RT3_4 RT3_5: library part R0402_4K7_1%_0.0625W_100PPM, "Resistor - 1%", Case=0402, Manufacturer=GENERIC, Manufacturer1 ComponentHeight=0.4mm, Manufacturer1 Example="YAGEO PHYCOMP", Manufacturer1 Part Number=232270674702L, Power=0.0625W, Tolerance=±1%, Author="CERN DEM JLC", Component Type=Standard, CreateDate=03/12/2007, HelpURL=\\cern.ch\dfs\Applications\Altium\Datasheets\R0402_Phycomp_RC0402.pdf, LatestRevisionDate=17/10/2012, Manufacturer Part Number=R0402_4K7_1%_0.0625W_100PPM, Mounted=Yes, Part Description="General Purpose Thick Film Chip Resistor", Part Number=R0402_4K7_1%_0.0625W_100PPM, Pin Count=2, Sense=No, SMD=Yes, Socket=No, Status="Not recommended", TC=±100ppm/°C
RR1_1 RR1_2 RR1_3 RR1_4 RR1_5 RR2_1 RR2_2 RR2_3 RR2_4 RR2_5 RR3_1 RR3_2 RR3_3 RR3_4 RR3_5 RT1_1 RT1_2 RT1_3 RT1_4 RT1_5 RT2_1 RT2_2 RT2_3 RT2_4 RT2_5 RT4_1 RT4_2 RT4_3 RT4_4 RT4_5: library part R0402_0R_JUMPER, "Resistor", Case=0402, Manufacturer=GENERIC, Manufacturer1 ComponentHeight=0.4mm, Manufacturer1 Example="YAGEO PHYCOMP", Manufacturer1 Part Number=232270591001L, Author="CERN DEM JLC", Component Type=Standard, CreateDate=03/12/2007, HelpURL=\\cern.ch\dfs\Applications\Altium\Datasheets\R0402_Phycomp_RC0402.pdf, LatestRevisionDate=17/10/2012, Manufacturer Part Number=R0402_0R_JUMPER, Mounted=Yes, Part Description="1A (0.05R Max DC Resistance) Zero Ohm Jumper", Part Number=R0402_0R_JUMPER, Pin Count=2, Sense=No, SMD=Yes, Socket=No, Status="Not recommended"
SCREW1 SCREW2 SCREW3 SCREW4: library part BOSSARD_BN5687-3061597_v, "Screw", Manufacturer=BOSSARD, Manufacturer Part Number="BN5687 Art.3061597", Author="CERN DEM JLC", ComponentHeight=2.1mm, Component Type=Mechanical, CreateDate=30/05/2013, HelpURL=\\cern.ch\dfs\Applications\Altium\Datasheets\BOSSARD_BN5687-3061597.pdf, LatestRevisionDate=30/05/2013, Mounted=Yes, PackageDescription="M2.5 L=6mm Hexalobular Socket Pan Head Screw, Fully Threaded - Stainless Steel A2", Part Description="M2.5 L=6mm Hexalobular Socket Pan Head Screw, Fully Threaded, Stainless Steel A2", Part Number=BOSSARD_BN5687-3061597_v, Pin Count=0, PressFit=No, Sense=No, SMD=No, Socket=No, Status=None
NT1: Author="CERN DEM JLC", ComponentHeight=0mm, Component Type="Net Tie", CreateDate=22/03/2011, Family="Net Tie", HelpURL=Undefined, LatestRevisionDate=22/03/2011, Mounted=No, PackageDescription="2 Plated Through Hole For Coaxial Cable Link: Hole Dia.=1.4mm Pad Dia.=2.5mm", Part Description="Net Tie (2 Nets)", Part Number="Net Tie", Pin Count=2, Sense=No, SMD=No, Socket=No, Status=None

## Via types
v1: diameter 0.762, hole 0.305, Top Layer to Bottom Layer, 85 vias

## Nets (pads, with @x,y where several pads share a name; then routed paths per layer and width w, separated by ;. In a path a pad name is that pad's centre, name@x,y a point inside that pad or via, vN(x,y) a via of type N, cw(c..) or ccw(c..) an arc to the next point about the centre after c; other vN are vias at no path point)
3P3VAUX: C23.2 IC3.8 J2.d32 | length 17.4
  Top Layer w0.254: IC3.8 -10.15,45.05 -9.9,44.8 -8.9,44.8 -8.7,45 v1(-8.7,46.4) ; v1(2.3,46.7) 2.904,46.096 J2.d32
  Bottom Layer w0.254: v1(-8.7,46.4) -8.4,46.7 v1(2.3,46.7)
12P0V: J2.c35 J2.c37
AFBR_PIN1_1: CT1_1.2 J1_1.1 RR2_1.2 RT1_1.2 | length 9.7
  Top Layer w0.254: J1_1.1 -55.891,16.5 CT1_1.2 -50.98,16.48 RT1_1.2 RR2_1.2
AFBR_PIN1_2: CT1_2.2 J1_2.1 RR2_2.2 RT1_2.2 | length 9.7
  Top Layer w0.254: J1_2.1 -55.891,26.67 CT1_2.2 -50.98,26.65 RT1_2.2 RR2_2.2
AFBR_PIN1_3: CT1_3.2 J1_3.1 RR2_3.2 RT1_3.2 | length 9.7
  Top Layer w0.254: J1_3.1 -55.891,36.8 CT1_3.2 -50.98,36.78 RT1_3.2 RR2_3.2
AFBR_PIN1_4: CT1_4.2 J1_4.1 RR2_4.2 RT1_4.2 | length 9.7
  Top Layer w0.254: J1_4.1 -55.891,46.95 CT1_4.2 -50.98,46.93 RT1_4.2 RR2_4.2
AFBR_PIN1_5: CT1_5.2 J1_5.1 RR2_5.2 RT1_5.2 | length 9.7
  Top Layer w0.254: J1_5.1 -55.891,6.3 CT1_5.2 -50.98,6.28 RT1_5.2 RR2_5.2
AFBR_PIN4_1: J1_1.4 RR3_1.2 RT2_1.2 | length 7.9
  Top Layer w0.254: J1_1.4 -55.771,25.1 -50.8,25.1 -50.43,24.73 RR3_1.2 RT2_1.2 RT2_1.2@-49.3,24.2
AFBR_PIN4_2: J1_2.4 RR3_2.2 RT2_2.2 | length 7.9
  Top Layer w0.254: J1_2.4 -55.771,35.27 -50.8,35.27 -50.43,34.9 RR3_2.2 RT2_2.2 RT2_2.2@-49.3,34.37
AFBR_PIN4_3: J1_3.4 RR3_3.2 RT2_3.2 | length 7.9
  Top Layer w0.254: J1_3.4 -55.771,45.4 -50.8,45.4 -50.43,45.03 RR3_3.2 RT2_3.2 RT2_3.2@-49.3,44.5
AFBR_PIN4_4: J1_4.4 RR3_4.2 RT2_4.2 | length 7.9
  Top Layer w0.254: J1_4.4 -55.771,55.55 -50.8,55.55 -50.43,55.18 RR3_4.2 RT2_4.2 RT2_4.2@-49.3,54.65
AFBR_PIN4_5: J1_5.4 RR3_5.2 RT2_5.2 | length 7.9
  Top Layer w0.254: J1_5.4 -55.771,14.9 -50.8,14.9 -50.43,14.53 RR3_5.2 RT2_5.2 RT2_5.2@-49.3,14
Buffer_POF1: IC1.35 IC1.36 RR2_1.1 RT2_1.1 RT3_1.2 | length 37.9
  Top Layer w0.254: RT2_1.1 -47,24.2 -46.6,23.8 -46.6,17.67 RR2_1.1 RT3_1.2@-45.66,17.42 ; RT3_1.2 -38.8,17.43 -35.8,20.43 -35.8,31 -33.55,33.25 ; IC1.36 -33.55,33.25 ; IC1.35 -33.05,33.75 -33.55,33.25
Buffer_POF2: IC1.32 IC1.33 RR2_2.1 RT2_2.1 RT3_2.2 | length 37.9
  Top Layer w0.254: RT2_2.1 -47,34.37 -46.6,33.97 -46.6,27.84 RR2_2.1 RT3_2.2@-45.66,27.59 ; RT3_2.2 -43.84,27.6 -43.561,27.6 -43.561,30.108 -42.799,30.108 -42.799,27.6 -42.799,25.092 -42.037,25.092 -42.037,27.6 -41.656,27.6 -40.45,27.6 -33.3,34.75 ; IC1.33 -33.3,34.75 ; IC1.32 -32.8,35.25 -33.3,34.75
Buffer_POF3: IC1.28 IC1.29 RR2_3.1 RT2_3.1 RT3_3.2 | length 37.9
  Top Layer w0.254: RT2_3.1 -47,44.5 -46.6,44.1 -46.6,37.97 RR2_3.1 RT3_3.2@-45.66,37.72 ; RT3_3.2 -45.12,37.25 -44.196,37.25 -39.853,37.25 -39.853,35.142 -39.091,35.142 -39.091,37.25 -39.091,39.358 -38.329,39.358 -38.329,37.25 -38.329,35.142 -37.567,35.142 -37.567,37.25 -37.186,37.25 -33.45,37.25 ; IC1.29 -32.95,36.75 -33.45,37.25 ; IC1.28 -33.45,37.25
Buffer_POF4: IC1.25 IC1.26 RR2_4.1 RT2_4.1 RT3_4.2 | length 30.9
  Top Layer w0.254: RT2_4.1 -47,54.65 -46.6,54.25 -46.6,48.12 RR2_4.1 RT3_4.2@-45.66,47.87 ; RT3_4.2 -40.305,47.88 -36.9,44.475 -36.9,40.7 -34.95,38.75 -33.3,38.75 ; IC1.26 -32.8,38.25 -33.3,38.75 ; IC1.25 -33.3,38.75
Buffer_POF5: IC2.1 IC2.4 RR2_5.1 RT2_5.1 RT3_5.2 | length 37.9
  Top Layer w0.254: RT2_5.1 -47,14 -46.6,13.6 -46.6,7.47 RR2_5.1 RT3_5.2@-45.66,7.22 ; RT3_5.2 -41.427,7.23 -41.046,7.23 -41.046,9.297 -40.284,9.297 -40.284,7.23 -40.284,5.163 -39.522,5.163 -39.522,7.23 -38.481,7.23 IC2.4@-31.8,7.23 ; IC2.4@-31.605,7.23 IC2.4@-31.3,7.23 ; IC2.4 -29.775,7.225 -29.5,7.5 -29.5,8.9 -29.775,9.175 IC2.1
CLK0_M2C_N: J2.h5
CLK0_M2C_P: J2.h4
CLK1_M2C_N: J2.g3
CLK1_M2C_P: J2.g2
DP0_C2M_N: J2.c3
DP0_C2M_P: J2.c2
DP0_M2C_N: J2.c7
DP0_M2C_P: J2.c6
GA0: IC3.2 J2.c34 | length 22.6
  Top Layer w0.254: v1(-11.5,51.1) -10.65,50.25 IC3.2 ; J2.c34 5.836,48.636 v1(6.6,49.4)
  Bottom Layer w0.254: v1(-11.5,51.1) -9.8,49.4 v1(6.6,49.4)
GA1: IC3.1 J2.d35 | length 16.2
  Top Layer w0.254: IC3.1 -10.15,51.05 v1(-10.1,51.1) ; v1(2.3,50.4) 2.794,49.906 J2.d35
  Bottom Layer w0.254: v1(-10.1,51.1) -9.4,50.4 v1(2.3,50.4)
GBTCLK0_M2C_N: J2.d5
GBTCLK0_M2C_P: J2.d4
GND: B1.1 B4.1 C1_1.1 C1_2.1 C1_3.1 C1_4.1 C1_5.1 C2.1 C6.1 C12.1 C13.1 C14.1 C15.1 C16.1 C17.1 C22.1 C23.1 CR1_1.1 CR1_2.1 CR1_3.1 CR1_4.1 CR1_5.1 CT1_1.1 CT1_2.1 CT1_3.1 CT1_4.1 CT1_5.1 IC1.6 IC1.7 IC1.18 IC1.23 IC1.27 IC1.31 IC1.34 IC1.38 IC1.43 IC1.49 IC2.5 IC3.3 IC3.4 IC3.7 IC3.9 J1_1.2 J1_1.5 J1_1.8 J1_2.2 J1_2.5 J1_2.8 J1_3.2 J1_3.5 J1_3.8 J1_4.2 J1_4.5 J1_4.8 J1_5.2 J1_5.5 J1_5.8 J2.c1 J2.c4 J2.c5 J2.c8 J2.c9 J2.c12 J2.c13 J2.c16 J2.c17 J2.c20 J2.c21 J2.c24 J2.c25 J2.c28 J2.c29 J2.c32 J2.c33 J2.c36 J2.c38 J2.c40 J2.d2 J2.d3 J2.d6 J2.d7 J2.d10 J2.d13 J2.d16 J2.d19 J2.d22 J2.d25 J2.d28 J2.d37 J2.d39 J2.g1 J2.g4 J2.g5 J2.g8 J2.g11 J2.g14 J2.g17 J2.g20 J2.g23 J2.g26 J2.g29 J2.g32 J2.g35 J2.g38 J2.g40 J2.h3 J2.h6 J2.h9 J2.h12 J2.h15 J2.h18 J2.h21 J2.h24 J2.h27 J2.h30 J2.h33 J2.h36 J2.h39 NT1.1 R7.1 R8.2 RR3_1.1 RR3_2.1 RR3_3.1 RR3_4.1 RR3_5.1 RT3_1.1 RT3_2.1 RT3_3.1 RT3_4.1 RT3_5.1 RT4_1.1 RT4_2.1 RT4_3.1 RT4_4.1 RT4_5.1 | length 1.1
  Top Layer w0.152: NT1.1 -1.625,9.018 -1.208,9.312 -1.194,9.322 -1.194,9.132 -1.118,9.209 J2.h3
  other v1: -29.693,10.566 -34.468,30.81 -26.848,34.341 -30.15,34.366 -30.15,37.643 -26.797,37.694 -20.93,40.767 -10.9,47.9 -25.502,48.26 -13.335,64.313
LA00_CC_N: C20.1 J2.g7 | length 43.7
  Top Layer w0.254: C20.1 -22.313,7.6 -22.017,7.896 -21.5,7.896 -18.604,5 -14.26,5 -14.111,5.149 -14.111,7.029 -13.349,7.029 -13.349,3.12 -13.2,2.971 -11.72,2.971 -11.571,3.12 -11.571,5 0.468,5 2.008,6.54 2.008,13.417 1.46,13.965 0.476,13.965 J2.g7
LA00_CC_P: C21.1 J2.g6 | length 42.1
  Top Layer w0.254: C21.1 -22.313,8.7 -22.017,8.404 -21.29,8.404 -18.394,5.508 -14.619,5.508 -14.619,7.388 -14.47,7.537 -12.99,7.537 -12.841,7.388 -12.841,3.479 -12.079,3.479 -12.079,5.359 -11.93,5.508 0.258,5.508 1.5,6.75 1.5,13.207 1.25,13.457 0.476,13.457 J2.g6
LA01_CC_N: C5.1 J2.d9 | length 37.3
  Top Layer w0.254: C5.1 -19.204,34.146 -7.652,34.146 -7.544,34.254 v1@-7.503,34.254 ; v1(3.026,25.417) 2.833,25.417 2.75,25.5 2.214,24.964 2.214,19.383 2.965,18.632 2.965,16.79 3.25,16.505 3.524,16.505 J2.d9
  Bottom Layer w0.254: v1(-7.5,34) -6.968,34 1.882,25.15 2.4,25.15 2.667,25.417 v1(3.026,25.417)
LA01_CC_P: C7.1 J2.d8 | length 38.5
  Top Layer w0.254: C7.1 -19.204,34.654 -7.862,34.654 v1(-7.5,35.016) ; v1(2.336,26.164) 2.336,25.805 1.706,25.175 1.706,19.173 2.457,18.422 2.457,16.579 3.04,15.997 3.524,15.997 J2.d8
  Bottom Layer w0.254: v1(-7.5,35.016) -7.266,35.016 2.092,25.658 2.189,25.658 2.336,25.805 v1(2.336,26.164)
LA02_N: C9.1 J2.h8 | length 40.2
  Top Layer w0.254: C9.1 -19.423,37.973 -19.423,37.931 -19.25,37.758 -14.93,37.758 -14.391,37.218 v1(-14.032,37.218) ; v1(-12,15.25) -11.609,14.859 -3.086,14.859 -2.71,15.235 -1.556,15.235 J2.h8
  Bottom Layer w0.254: v1(-14.032,37.218) -14.032,36.859 -12.68,35.507 -12.68,15.57 -12.359,15.25 v1(-12,15.25)
LA02_P: C8.1 J2.h7 | length 40.4
  Top Layer w0.254: C8.1 -19.423,37.027 -19.423,37.077 -19.25,37.25 -15.141,37.25 -14.75,36.859 v1(-14.75,36.5) ; v1(-12.718,14.532) -12.538,14.351 -2.876,14.351 -2.5,14.727 -1.556,14.727 J2.h7
  Bottom Layer w0.254: v1(-14.75,36.5) -14.391,36.5 -13.188,35.297 -13.188,15.36 -12.718,14.891 v1(-12.718,14.532)
LA03_N: C11.1 J2.g10 | length 42.1
  Top Layer w0.254: C11.1 -22.204,43.254 -15.75,43.254 -13.35,40.854 -13.004,40.854 v1(-12.75,41.108) ; J2.g10 0.476,17.775 1.525,17.775 v1(1.718,17.968)
  Bottom Layer w0.254: v1(-12.75,41.108) -12.688,41.108 -8.242,36.662 -8.242,33.5 1,24.258 1,18.687 v1(1.718,17.968)
LA03_P: C10.1 J2.g9 | length 41.4
  Top Layer w0.254: C10.1 -22.204,42.746 -15.96,42.746 -13.56,40.346 -13.004,40.346 v1(-12.75,40.092) ; J2.g9 0.476,17.267 0.983,17.267 v1(1.25,17)
  Bottom Layer w0.254: v1(-12.75,40.092) -8.75,36.092 -8.75,33.29 0.492,24.048 0.492,17.758 v1(1.25,17)
LA04_N: C4.1 J2.h11 | length 37
  Top Layer w0.254: C4.1 -25.4,27.413 -25.746,27.067 -25.746,21.75 -25.75,21.746 -25.75,17 -25.258,16.508 -4.497,16.508 -1.96,19.045 -1.556,19.045 J2.h11
LA04_P: C3.1 J2.h10 | length 37.8
  Top Layer w0.254: C3.1 -26.6,27.413 -26.254,27.067 -26.254,21.96 -26.258,21.956 -26.258,16.79 -25.468,16 -4.287,16 -1.75,18.537 -1.556,18.537 J2.h10
LA05_N: D2.2 J2.d12 R10.1 | length 30.9
  Top Layer w0.254: R10.1 D2.2 ; -11.1,21.15 -10.5,21.75 v1(-6.25,21.75) ; J2.d12 4.53,21.321 v1@6.679,21.321 ; v1@6.679,21.25 v1(6.75,21.25)
  Bottom Layer w0.254: v1(-6.25,21.75) -5.75,21.75 0,16 6,16 6.75,16.75 v1(6.75,21.25)
LA05_P: D1.2 J2.d11 R9.1 | length 29.4
  Top Layer w0.254: R9.1 D1.2 -10,24.5 v1(-7.25,24.5) ; v1(2.5,15) 3.637,15 3.646,14.991 4.241,14.991 4.53,15.28 4.53,18.801 J2.d11
  Bottom Layer w0.254: v1(-7.25,24.5) -7.25,20.75 -1.5,15 v1(2.5,15)
LA06_N: D4.2 J2.c11 R12.1 | length 35
  Top Layer w0.254: R12.1 D4.2 -11.1,29.15 -10.039,30.211 6.789,30.211 8.186,28.814 8.186,20.686 6.926,19.426 J2.c11
LA06_P: D3.2 J2.c10 R11.1 | length 33.2
  Top Layer w0.254: R11.1 D3.2 -9.129,27.671 6.329,27.671 7.25,26.75 v1(7.5,26.75) ; J2.c10 7.406,18.156 v1(7.5,18.25)
  Bottom Layer w0.254: v1(7.5,18.25) v1(7.5,26.75)
LA07_N: J2.h14
LA07_P: D5.2 J2.h13 R13.1 | length 14.2
  Top Layer w0.254: R13.1 D5.2 -11.1,18.4 -10.25,19.25 -4.682,19.25 -1.966,21.966 J2.h13
LA08_N: J2.g13
LA08_P: J2.g12
LA09_N: J2.d15
LA09_P: J2.d14
LA10_N: J2.c15
LA10_P: J2.c14
LA11_N: J2.h17
LA11_P: J2.h16
LA12_N: J2.g16
LA12_P: J2.g15
LA13_N: J2.d18
LA13_P: J2.d17
LA14_N: J2.c19
LA14_P: J2.c18
LA15_N: J2.h20
LA15_P: J2.h19
LA16_N: J2.g19
LA16_P: J2.g18
LA17_CC_N: J2.d21
LA17_CC_P: J2.d20
LA18_CC_N: J2.c23
LA18_CC_P: J2.c22
LA19_N: J2.h23
LA19_P: J2.h22
LA20_N: J2.g22
LA20_P: J2.g21
LA21_N: J2.h26
LA21_P: J2.h25
LA22_N: J2.g25
LA22_P: J2.g24
LA23_N: J2.d24
LA23_P: J2.d23
LA24_N: J2.h29
LA24_P: J2.h28
LA25_N: J2.g28
LA25_P: J2.g27
LA26_N: J2.d27
LA26_P: J2.d26
LA27_N: J2.c27
LA27_P: J2.c26
LA28_N: J2.h32
LA28_P: J2.h31
LA29_N: J2.g31
LA29_P: J2.g30
LA30_N: J2.h35
LA30_P: J2.h34
LA31_N: J2.g34
LA31_P: J2.g33
LA32_N: J2.h38
LA32_P: J2.h37
LA33_N: J2.g37
LA33_P: J2.g36
LVDS_IO1C_N: C4.2 IC1.48 R1.1 | length 3.9
  Top Layer w0.254: IC1.48 -25.75,30.02 R1.1 -25.53,29.317 -25.4,29.187 C4.2
LVDS_IO1C_P: C3.2 IC1.47 R1.2 | length 3.9
  Top Layer w0.254: C3.2 -26.6,29.187 -26.47,29.317 R1.2 -26.25,30.02 IC1.47
LVDS_IO2C_N: C7.2 IC1.4 R2.1 | length 4.7
  Top Layer w0.254: IC1.4 -22.557,34.75 -22.437,34.87 R2.1 -21.017,34.87 -20.887,35 C7.2
LVDS_IO2C_P: C5.2 IC1.3 R2.2 | length 4.8
  Top Layer w0.254: IC1.3 -22.757,34.25 -22.437,33.93 R2.2 -21.017,33.93 -20.887,33.8 C5.2
LVDS_IO3C_N: C9.2 IC1.10 R3.1 | length 4.7
  Top Layer w0.254: IC1.10 -22.657,37.75 -22.437,37.97 R3.1 -20.917,37.97 -20.887,38 C9.2@-20.45,38
LVDS_IO3C_P: C8.2 IC1.9 R3.2 | length 4.7
  Top Layer w0.254: IC1.9 -22.657,37.25 -22.437,37.03 R3.2 -20.917,37.03 -20.887,37 C8.2@-20.45,37
LVDS_IO4C_N: C11.2 IC1.14 R4.1 | length 6.2
  Top Layer w0.254: IC1.14@-26.258,39.45 -26.258,42.236 -25.21,43.284 -24.716,43.284 R4.1 -23.987,43.5 -23.887,43.6 C11.2
LVDS_IO4C_P: C10.2 IC1.13 R4.2 | length 5.3
  Top Layer w0.254: IC1.13 -25.75,42.026 -25,42.776 -24.716,42.776 R4.2 -24.047,42.56 -23.887,42.4 C10.2
LVDS_IO5C_N: C21.2 IC2.7 R6.1 | length 3.7
  Top Layer w0.381: IC2.7 -25.675,8.525 -25.43,8.77 R6.1@-24.8,8.77 ; R6.1 -23.68,8.67 C21.2
LVDS_IO5C_P: C20.2 IC2.6 R6.2 | length 3.7
  Top Layer w0.381: IC2.6 -25.675,7.875 -25.43,7.63 R6.2@-24.8,7.63 ; R6.2 -23.78,7.73 C20.2
NetIC1_30: IC1.30 R5.1 | length 2.4
  Top Layer w0.254: R5.1 -34.28,36.25 IC1.30
NetLD1_1: LD1.1 R8.1 | length 1.7
  Top Layer w0.508: R8.1 -10.83,64.2 LD1.1
P3V3: J2.c39 J2.d36 J2.d38 J2.d40 L1.1 L2.1 LD1.2 | length 66.1
  Top Layer w0.508: L1.1 -41.8,60.2 -38.8,63.2 -8.3,63.2 -7.7,62.6 ; L2.1 L2.1@-7.7,62 ; LD1.2 -7.7,62.6 ; J2.d36 2.824,51.176 2.4,51.6 2.4,53.3 2.816,53.716 ; J2.d38 2.816,53.716 ; J2.c39 J2.d40 3.861,56.3 2.7,56.3 2.4,56 ; L2.1@-7.7,62 -6.8,62 -5.7,60.9 -5.7,58.3 -4.702,57.302 1.098,57.302 2.4,56 ; L2.1@-7.7,62 -7.7,62.6 ; 2.4,56 2.4,54.132 2.816,53.716
PG_C2M: J2.d1
POF_IsReceiver1: CR1_1.2 IC1.1 IC1.40 J1_1.3 R9.2 RR1_1.2 RT4_1.2 | length 65
  Top Layer w0.254: J1_1.3@-56.211,21.9 v1(-50.53,21.9) -50.53,22.701 -50.331,22.9 RR1_1.2@-49.351,22.9 ; RT4_1.2@-50.53,20.95 -50.53,21.77 v1@-50.4,21.9 ; IC1.40 -29.75,30.85 v1(-29.5,30.6) ; IC1.1 -24.55,33.25 -24.3,33 -24.3,32.4 v1(-24.4,32.3) -24.4,27.3 -20.4,23.3 R9.2
  Bottom Layer w0.254: -40.4,21.9 -30.6,21.9 -27.9,24.6 -27.9,29 v1(-29.5,30.6) -27.8,32.3 v1(-24.4,32.3)
  Bottom Layer w0.305: v1(-50.53,21.9) -40.4,21.9
  other v1: -17.2,23.3
POF_IsReceiver2: CR1_2.2 IC1.5 IC1.42 J1_2.3 R10.2 RR1_2.2 RT4_2.2 | length 73.6
  Top Layer w0.254: J1_2.3@-56.211,32.07 v1(-50.53,32.07) -50.53,32.871 -50.331,33.07 RR1_2.2@-49.351,33.07 ; RT4_2.2@-50.53,31.12 -50.53,31.94 v1@-50.4,32.07 ; v1(-29,28.6) -29,29.3 -28.3,30 -28.3,31.2 -28.75,31.65 IC1.42 ; IC1.5 -23.75,35.25 v1(-23.4,35.6) ; v1(-17.2,20.9) -17.1,20.8 R10.2
  Bottom Layer w0.254: -40.4,32.07 -37.07,32.07 -33.6,28.6 v1(-29,28.6) -30.3,29.9 -30.3,33 -30.142,33.158 -26.042,33.158 -23.6,35.6 v1(-23.4,35.6) -22.5,34.7 -22.5,21.6 -21.8,20.9 -21.3,20.9 ; -21.4,20.9 v1(-17.2,20.9)
  Bottom Layer w0.305: v1(-50.53,32.07) -40.4,32.07
POF_IsReceiver3: CR1_3.2 IC1.8 IC1.19 J1_3.3 R11.2 RR1_3.2 RT4_3.2 | length 67.3
  Top Layer w0.254: J1_3.3@-56.211,42.2 v1(-50.53,42.2) -50.53,43.001 -50.331,43.2 RR1_3.2@-49.351,43.2 ; RT4_3.2@-50.53,41.25 -50.53,42.07 v1@-50.4,42.2 ; v1(-29.3,42.5) -29.1,42.5 -28.75,42.15 IC1.19 ; IC1.8 -23.15,36.75 v1(-22.4,36) ; v1(-17.3,25.7) -16,25.7 R11.2
  Bottom Layer w0.254: -40.4,42.2 -33.39,42.2 -32.639,42.951 -30.912,42.951 -30.137,42.177 ; v1(-29.3,42.5) -29.6,42.2 -30.088,42.2 -31.1,41.188 -31.1,40.3 -27.5,36.7 -23.1,36.7 v1(-22.4,36) -21.7,35.3 -21.7,26.2 -21.2,25.7 v1(-17.3,25.7)
  Bottom Layer w0.305: v1(-50.53,42.2) -40.4,42.2
POF_IsReceiver4: CR1_4.2 IC1.12 IC1.21 J1_4.3 R12.2 RR1_4.2 RT4_4.2 | length 66.6
  Top Layer w0.254: J1_4.3@-56.211,52.35 v1(-50.53,52.35) -50.53,53.151 -50.331,53.35 RR1_4.2@-49.351,53.35 ; RT4_4.2@-50.53,51.4 v1@-50.53,52.22 ; v1(-30,40.7) -29.75,40.45 IC1.21 ; IC1.12 -24.35,38.75 -24.2,38.9 -24.2,39.5 v1(-24.6,39.9) ; v1(-17.4,28.6) R12.2
  Bottom Layer w0.254: -40.4,52.35 -37.15,52.35 -28.2,43.4 -28.2,42 -29.5,40.7 ; v1(-30,40.7) -29.5,40.7 ; v1(-17.4,28.6) -19.9,28.6 -20.9,29.6 -20.9,37.9 -22.9,39.9 v1(-24.6,39.9) -25.4,40.7 -29.5,40.7
  Bottom Layer w0.305: v1(-50.53,52.35) -40.4,52.35
POF_IsReceiver5: CR1_5.2 IC2.2 IC2.3 J1_5.3 R13.2 RR1_5.2 RT4_5.2 | length 55
  Top Layer w0.254: J1_5.3@-56.211,11.7 v1(-50.53,11.7) -50.53,12.501 -50.331,12.7 RR1_5.2@-49.351,12.7 ; RT4_5.2@-50.53,10.75 -50.53,11.57 v1@-50.4,11.7 ; v1(-40.4,11.7) -36.9,8.2 v1@-33.9,8.2 ; -33.575,7.875 IC2.3 ; -33.575,8.525 IC2.2 ; v1(-17.1,18.1) R13.2
  Bottom Layer w0.254: v1(-33.8,8.2) -33.8,9.7 -25.4,18.1 v1(-17.1,18.1)
  Bottom Layer w0.305: v1(-50.53,11.7) v1(-40.4,11.7)
PRSNT_M2C_L: J2.h2 NT1.2 | length 0.8
  Top Layer w0.152: NT1.2@-1.676,8.484 NT1.2 -1.524,8.484 -1.175,8.135 J2.h2
SCL: IC3.6 J2.c30 | length 22.6
  Top Layer w0.254: v1(-11.15,44.2) IC3.6 ; J2.c30 6.056,43.556 v1(6.6,44.1)
  Bottom Layer w0.254: v1(-11.15,44.2) -8.6,44.2 -7.4,45.4 1.4,45.4 2,44.8 5.9,44.8 v1(6.6,44.1)
SDA: IC3.5 J2.c31 | length 23
  Top Layer w0.254: v1(-12.4,45.2) -12.095,45.2 -11.65,45.645 IC3.5 ; J2.c31 5.926,44.826 v1(6.6,45.5)
  Bottom Layer w0.254: v1(-12.4,45.2) -8.5,45.2 -7.6,46.1 1.7,46.1 2.3,45.5 v1(6.6,45.5)
TCK: J2.d29
TDI: J2.d30
TDO: J2.d31
TMS: J2.d33
TRST_L: J2.d34
Type2Receiver: IC1.20 IC1.22 IC1.39 IC1.41 R7.2 | length 28.5
  Top Layer w0.254: v1(-31.877,41.783) -31.483,41.783 -30.7,41 ; v1(-31.039,29.87) -31.039,29.709 R7.2@-30.25,28.92 ; IC1.22@-30.269,39.819 -30.269,39.969 -30.7,40.4 -30.7,41 ; IC1.39 R7.2@-30.25,28.92 ; IC1.22 IC1.22@-30.25,39.8 ; R7.2 R7.2@-30.215,28.885 ; IC1.41 -29.25,32.2 -29.231,32.181 -29.231,31.331 -28.8,30.9 -28.8,30.3 R7.2@-30.215,28.885 ; IC1.20 -29.25,41.4 -30.3,41.4 -30.7,41 ; R7.2@-30.25,28.92 R7.2@-30.215,28.885
  Bottom Layer w0.254: v1(-31.877,41.783) -31.877,40.208 -31.039,39.37 v1(-31.039,29.87)
VADJ: D1.1 D2.1 D3.1 D4.1 D5.1 J2.g39 J2.h1 J2.h40 | length 74.2
  Top Layer w0.381: D1.1 v1(-8.5,23.3) ; D5.1 v1(-8.5,18.1) ; D2.1 v1(-8.5,20.8) ; D3.1 v1(-8.5,25.7) ; D4.1 v1(-8.5,28.6) ; v1(-6.604,56.185) -1.246,56.185 J2.h40 J2.g39 ; v1(-3,6.7) -1.201,6.7 J2.h1
  Bottom Layer w0.381: v1(-6.604,56.185) -9.296,56.185 -14.376,51.105 -14.376,39.446 -10.693,35.763 -10.693,31.693 -8.5,29.5 v1(-8.5,28.6) v1(-8.5,25.7) v1(-8.5,23.3) v1(-8.5,20.8) v1(-8.5,18.1) -3,12.6 v1(-3,6.7)
VBUF: C6.2 C12.2 C13.2 C14.2 C15.2 C16.2 C17.2 C22.2 IC1.2 IC1.11 IC1.15 IC1.16 IC1.24 IC1.37 IC1.45 IC1.46 IC2.8 L2.2 R5.2 | length 117.4
  Top Layer w0.254: -32.6,40.34 -31.69,40.34 -31.25,39.9 IC1.24 ; C16.2@-32.081,31.15 -31.85,31.15 -31.25,31.75 IC1.37 ; C22.2 -25.9,10.5 -25.7,10.3 -25.7,9.4 -25.925,9.175 IC2.8 ; -27.3,41 -27.25,40.95 ; v1@-27.25,30.85 IC1.45 ; IC1.16 -27.25,40.95 ; v1@-26.75,30.8 IC1.46 ; IC1.15 -26.75,40.45 -27.25,40.95 ; IC1.2 -23.95,33.75 -23.2,33 C15.2@-23.2,32.45 ; IC1.11 -24,38.25 C14.2@-22.39,39.86
  Top Layer w0.508: v1(-35.3,35.1) -35.3,36.17 R5.2 ; v1(-32.6,39.7) -32.6,40.34 C12.2 -33.129,42.766 -32.309,43.586 -27.628,43.586 C13.2 ; C16.2 v1(-32.25,30.1) -32.25,27.55 -31.3,26.6 -28.6,26.6 ; C17.2 -28.35,26.85 -28.6,26.6 ; C17.2@-27.7,27.05 -27.7,30.1 v1@-27.1,30.7 ; C22.2 -27.35,12.65 -28.6,13.9 -28.6,26.6 ; C6.2 -27.349,46.032 C13.2 ; -27.3,41 -27.349,41.049 C13.2 ; v1(-23.647,40.996) -23.495,40.843 -23.495,40.183 -23.172,39.86 -22.39,39.86 C14.2 ; v1(-23.4,31.2) -23.15,31.45 C15.2 ; v1(-11.405,58.674) -11.405,59.895 L2.2
  Bottom Layer w0.508: v1(-32.6,39.7) -34.3,39.7 -35.3,38.7 v1(-35.3,35.1) -35.3,33.7 -32.25,30.65 v1(-32.25,30.1) ; v1(-27,30.9) -23.7,30.9 v1(-23.4,31.2) ; v1(-23.647,40.996) -24.206,40.996 -25.121,41.91 v1(-27.356,41.91) -27.356,42.723 v1(-11.405,58.674)
VCC_POF: C1_1.2 C1_2.2 C1_3.2 C1_4.2 C1_5.2 C2.2 L1.2 RR1_1.1 RR1_2.1 RR1_3.1 RR1_4.1 RR1_5.1 RT1_1.1 RT1_2.1 RT1_3.1 RT1_4.1 RT1_5.1 | length 68.1
  Top Layer w0.254: v1@-48.13,17.42 v1(-48.1,17.45) ; v1@-48.13,27.59 v1(-48.1,27.62) ; v1@-48.13,37.72 v1(-48.1,37.75) ; v1@-48.13,47.87 v1(-48.1,47.9)
  Top Layer w0.508: RT1_5.1 -49.25,10.15 -48.33,11.07 RR1_5.1 v1(-47.3,12.8) ; C2.2 L1.2 -46.65,58.95 v1(-46.6,58.9) ; v1@-48.13,17.42 RT1_1.1 -49.25,20.35 -48.33,21.27 RR1_1.1 v1(-47.3,23) ; v1@-48.13,27.59 RT1_2.1 -49.25,30.52 -48.33,31.44 RR1_2.1 v1(-47.3,33.17) ; v1@-48.13,37.72 RT1_3.1 -49.25,40.65 -48.33,41.57 RR1_3.1 v1(-47.3,43.3) ; v1@-48.13,47.87 RT1_4.1 -49.25,50.8 -48.33,51.72 RR1_4.1 v1(-47.3,53.45)
  Bottom Layer w0.508: v1(-48.1,17.45) -47.3,16.65 v1@-47.3,12.85 ; v1(-48.1,27.62) -47.3,26.82 v1(-47.3,23) ; v1(-48.1,37.75) -47.3,36.95 v1(-47.3,33.17) ; v1(-48.1,47.9) -47.3,47.1 v1(-47.3,43.3) ; v1(-47.3,53.45) -47.3,57.6 -46.6,58.3 v1(-46.6,58.9)
pads on no net: B2_Panel.1 B3_Panel.1 IC1.17 IC1.44 J2.1 J2.2

## Polygon pours and split planes (outlines as drawn)
GND on Top Layer "Bottom Layer-GND" (solid, pour order 0): 10.9,66 10.9,-3 -66,-3 -66,66
GND on Bottom Layer "Bottom Layer-GND" (solid, pour order 2): 10.9,66 10.9,-3 -66,-3 -66,66

## Keep-outs
Keep-Out Layer: